# Altium PCB LMAT_AMT_MAG.PcbDoc (part 1 of 2)
Units mil, origin at the board's own origin, x right, y up, seen from the top; angles counter-clockwise.
Board outline 1437.01 x 1604.33 mil, 2 copper layers (Top Layer, Bottom Layer), stack 62.192 mil thick; 79 components, 39 nets, 215 pads, 131 vias.
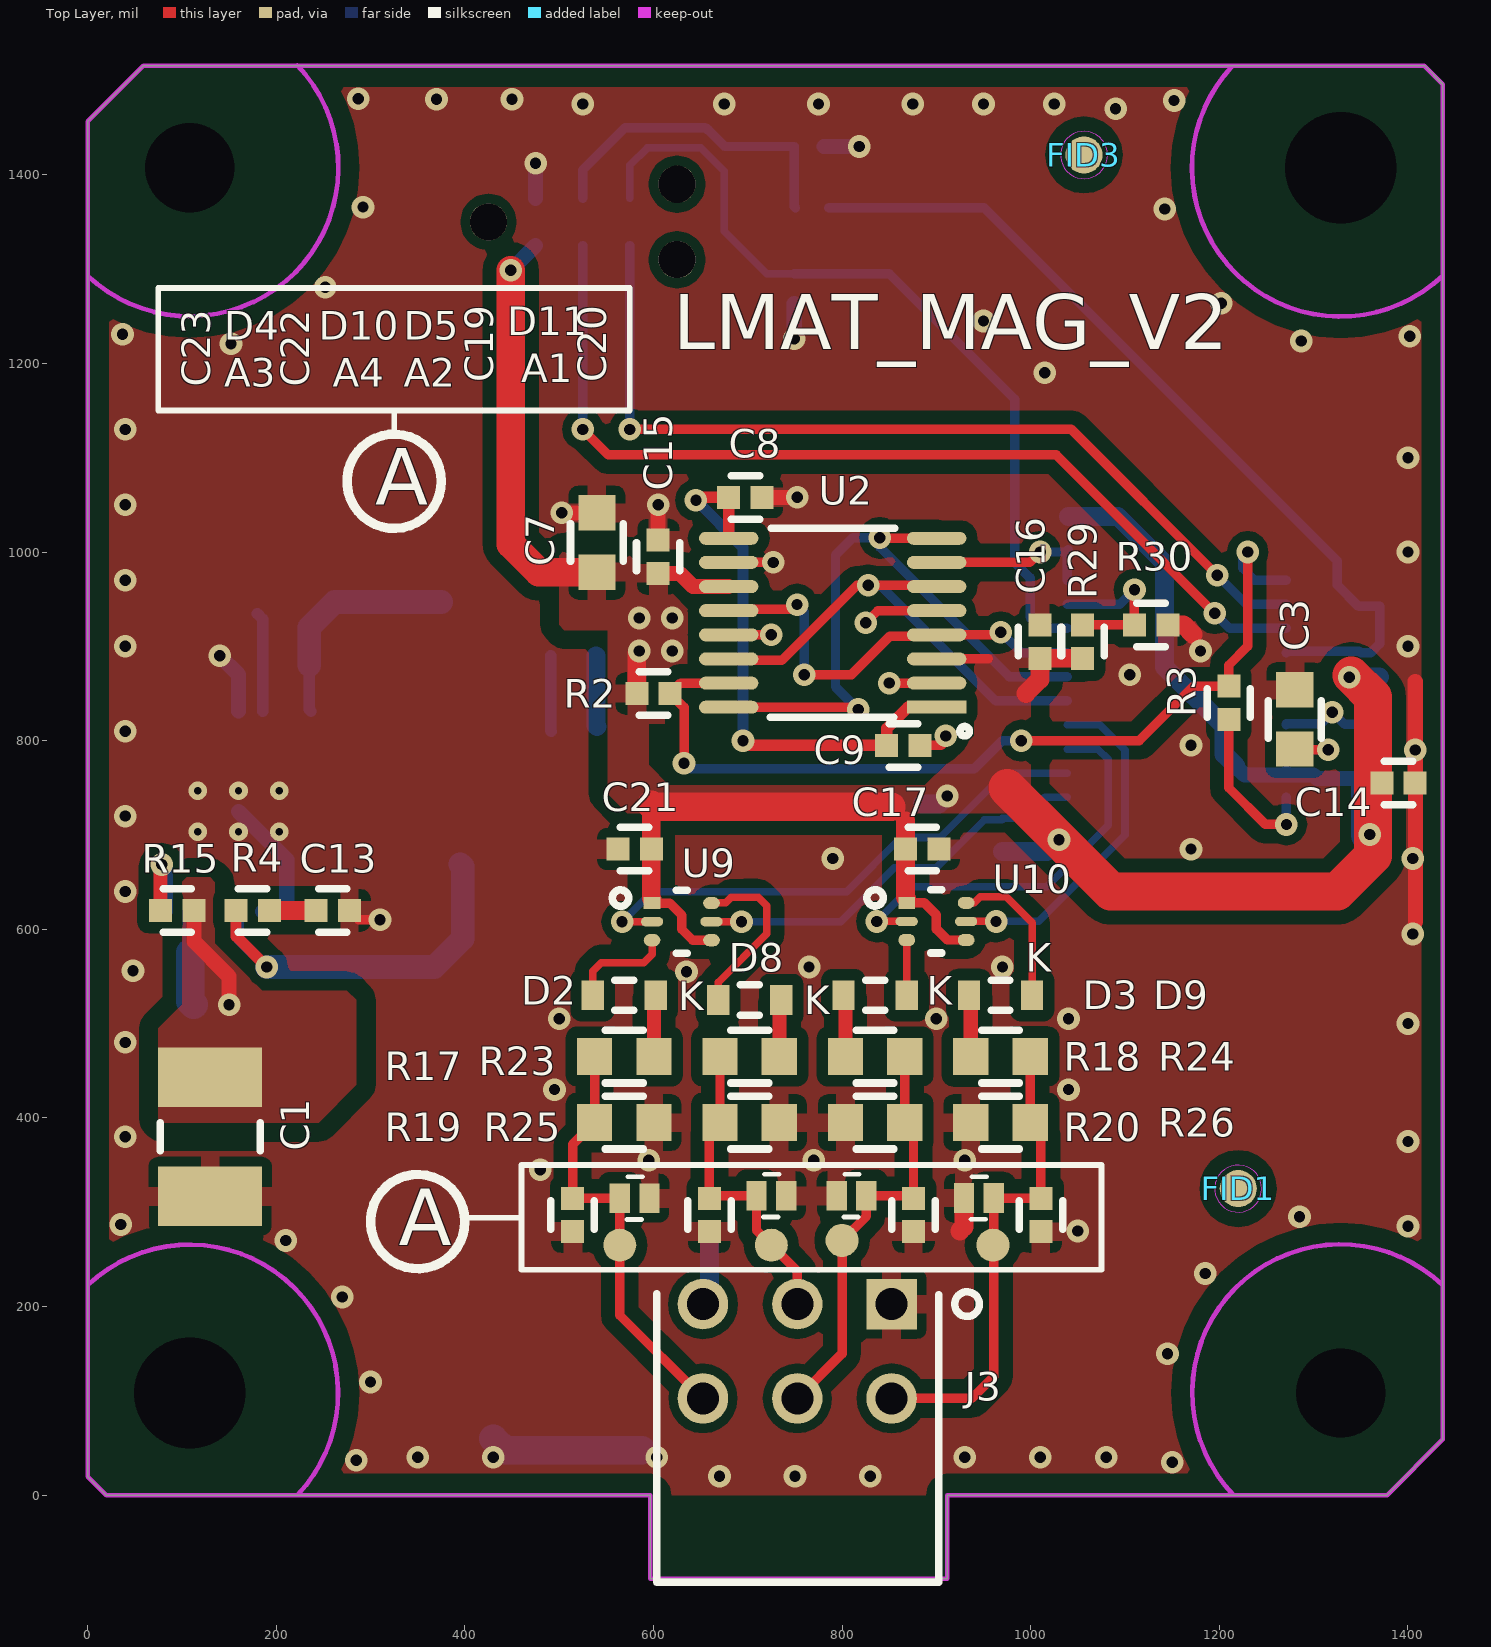
[diagram p0: Top Layer view]
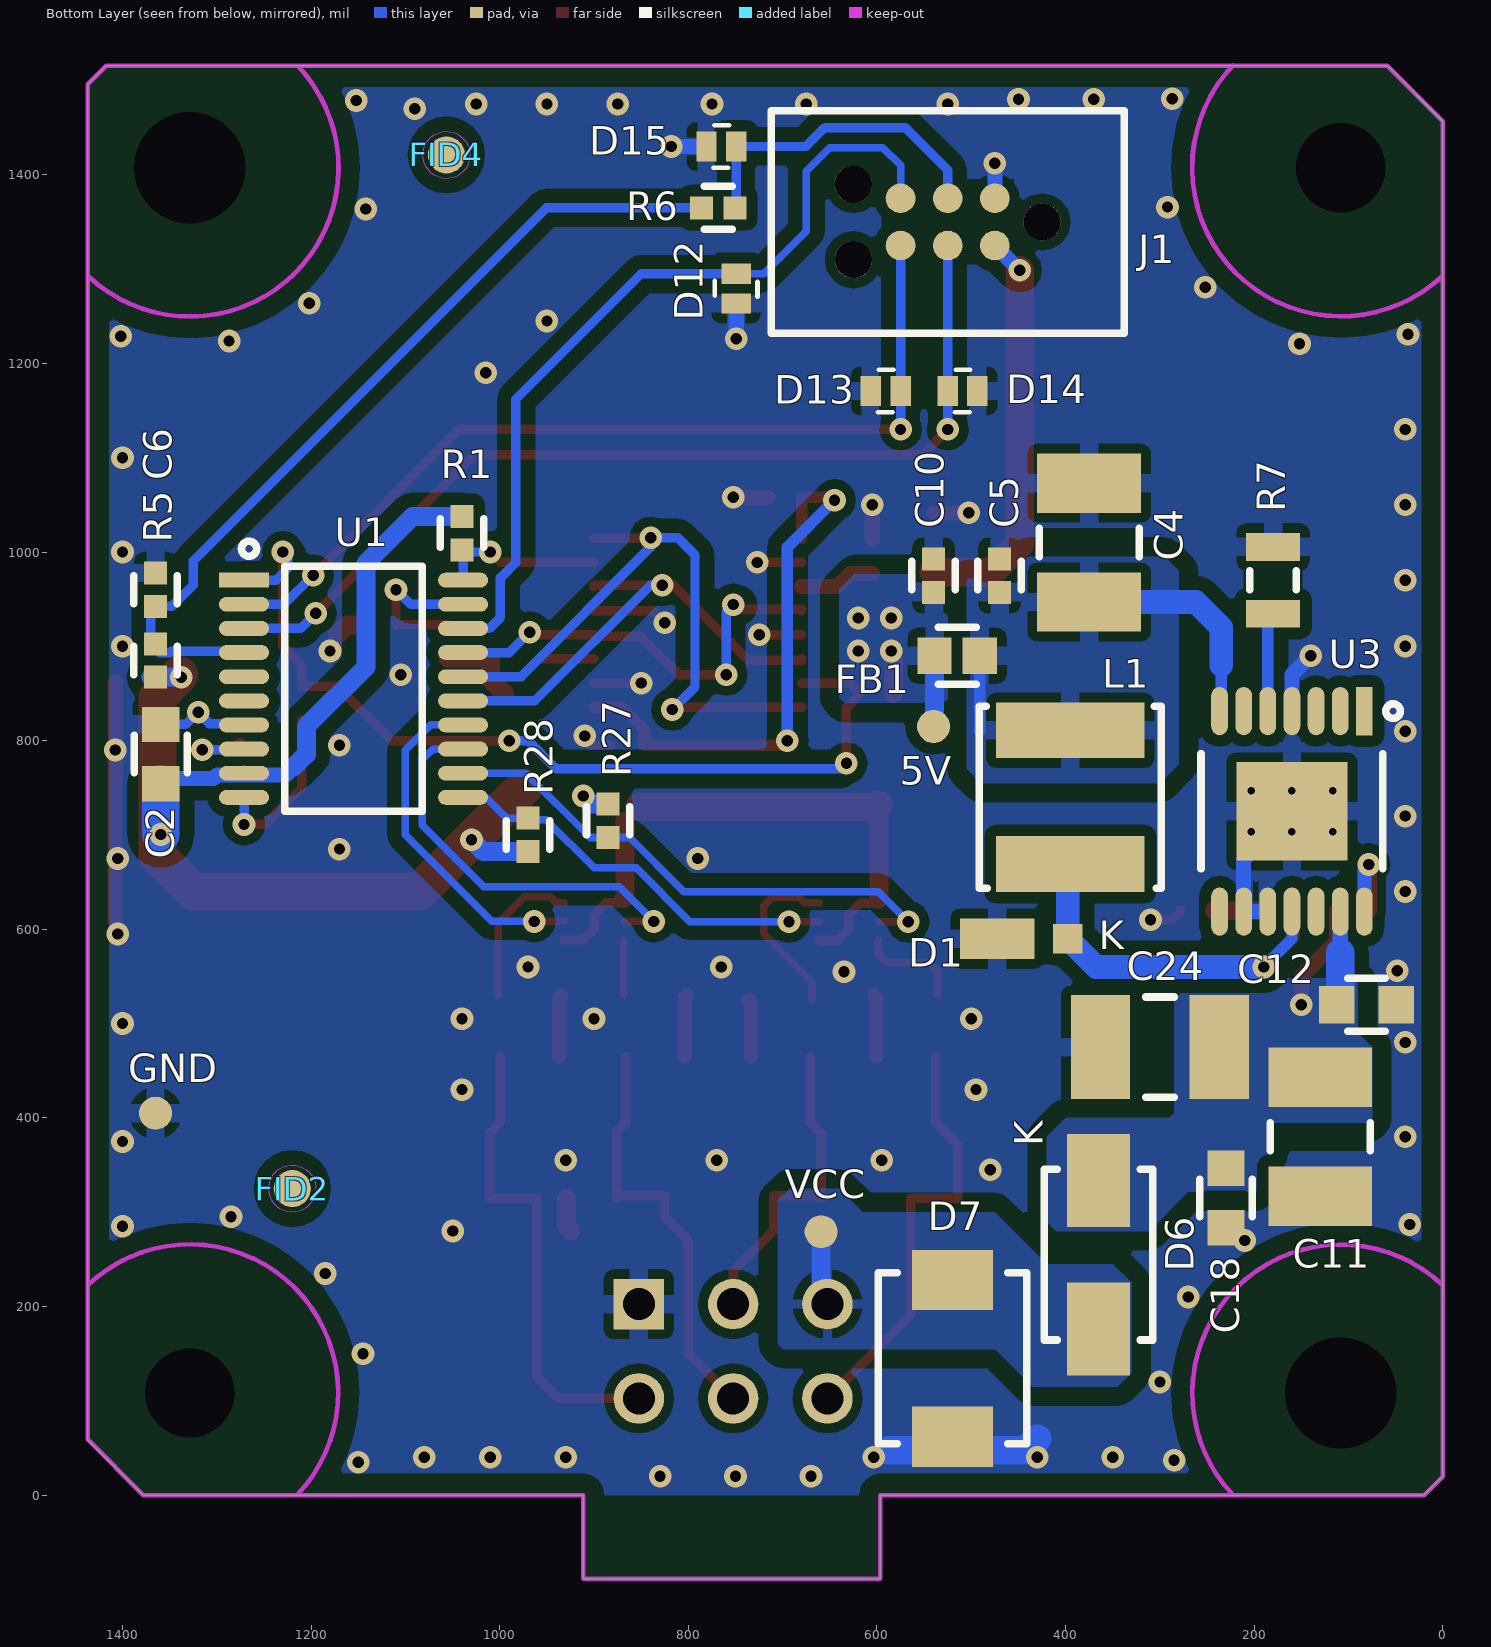
[diagram p1: Bottom Layer view, seen from below]
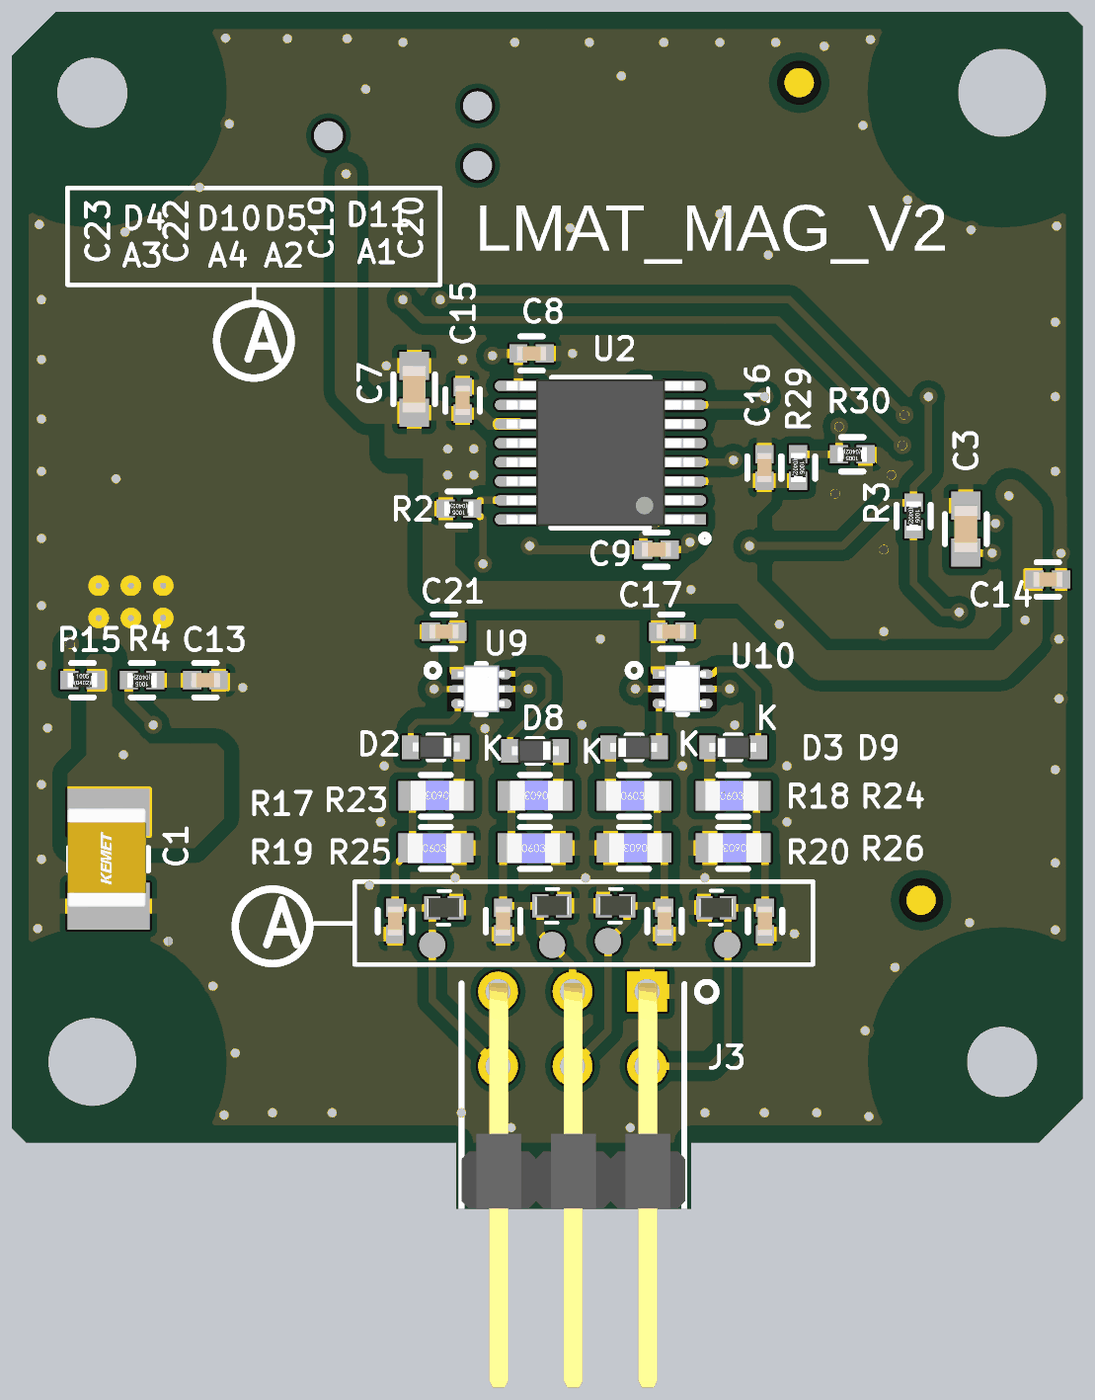
[diagram p3: 3D render of the assembled board from above, using the file's embedded part models]
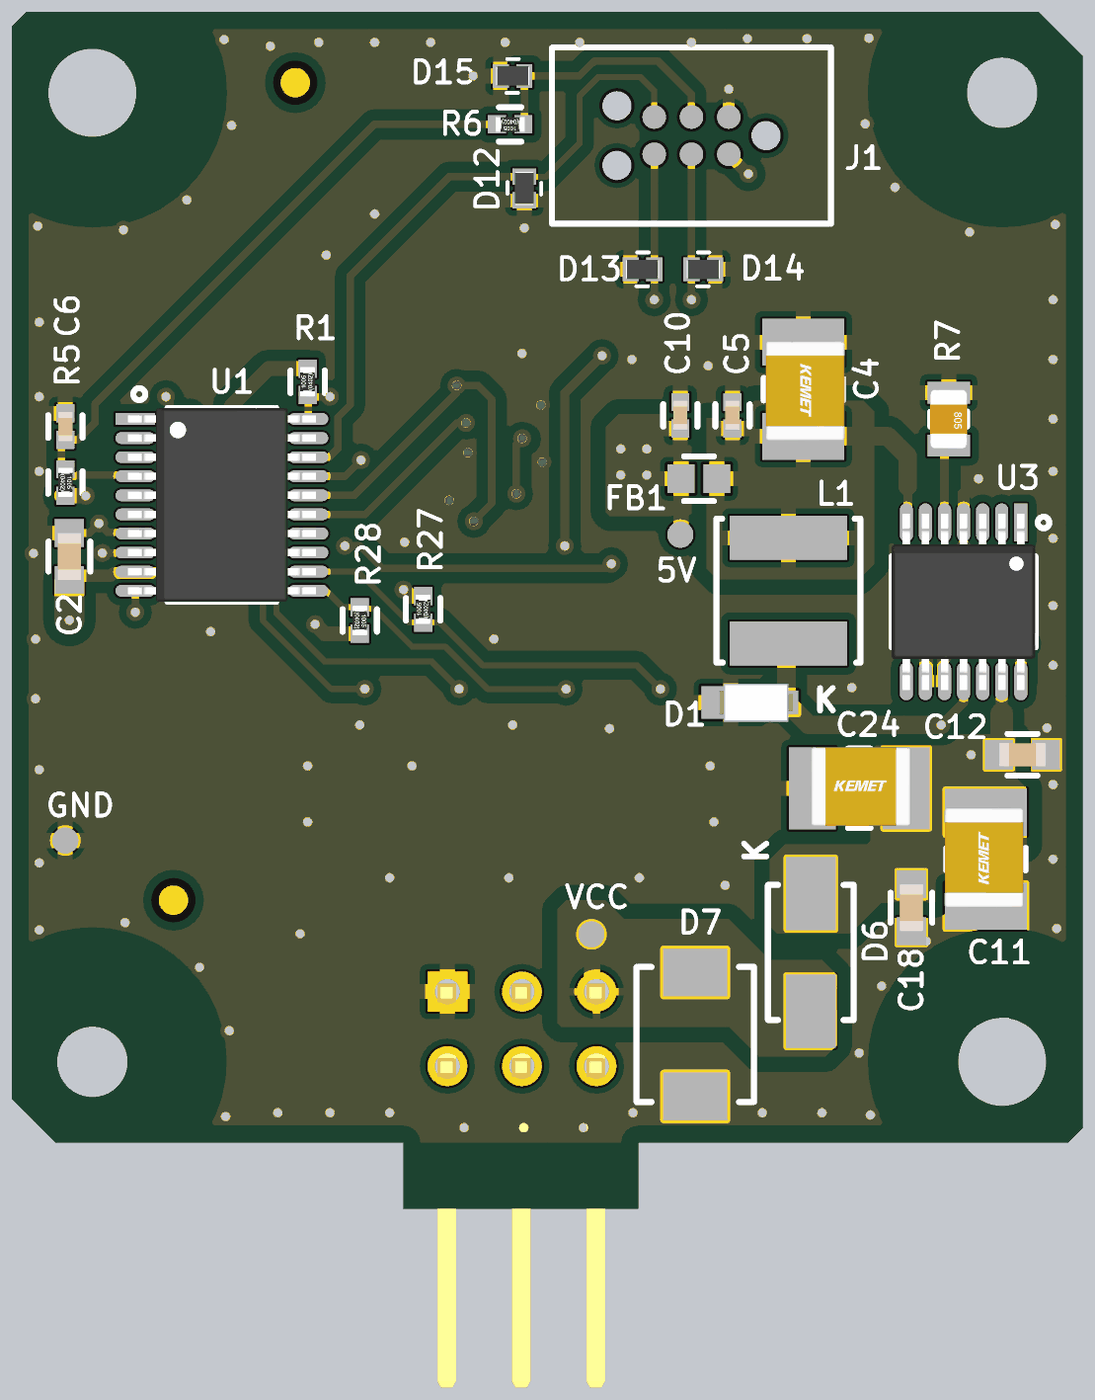
[diagram p4: 3D render of the assembled board from below, using the file's embedded part models]

## Layer stack, top to bottom
Top Solder: solder mask 0.4, Solder Resist, Dk 3.5
Top Layer: signal copper 1.4
Dielectric 1: core 59.392, FR-4, Dk 4.2
Bottom Layer: signal copper 1.4
Bottom solder: solder mask 0.4, Solder Resist, Dk 3.5

## Board outline
0,19.68 19.68,0 596.46,0 596.46,-88.58 911.42,-88.58 911.42,0 1377.95,0 1437.01,59.05 1437.01,1496.06 1417.32,1515.75 59.06,1515.75 0,1456.69

## Design rules (kind name [scope] priority, off if disabled: settings)
AcuteAngle [All] p1: minimum=6.00000000000000E+0001 checktracksonly=TRUE
Clearance Clearance_keepout [(OnLayer('Keep-Out Layer'))] p1: gap=30 ignorepadtopadclearanceinfootprint=TRUE except(0: Arc-Text Arc-Hole Track-Text Track-Hole SMDPad-Text SMDPad-Hole THPad-Text THPad-Hole Via-Text Via-Hole Fill-Text Fill-Hole Poly-Text Poly-Hole Region-Text Region-Hole Text-Text Text-Hole; 10: Arc-Track Arc-SMDPad Arc-THPad Arc-Via Track-Track Track-SMDPad Track-THPad Track-Via SMDPad-Region; 15: Arc-Arc; 20: Arc-Poly Track-Poly; 25: Fill-Fill Poly-Poly)
Clearance [All] p2: gap=15 ignorepadtopadclearanceinfootprint=TRUE except(0: Arc-Hole Track-Hole SMDPad-Hole THPad-Hole Via-Hole Fill-Hole Poly-Hole Region-Hole Text-Hole; 8: Track-SMDPad SMDPad-Via; 10: Arc-Track Track-Track Track-Via Track-Region SMDPad-SMDPad SMDPad-Region THPad-Poly THPad-Region Via-Poly Via-Region; 12: SMDPad-Poly; 20: Poly-Poly)
ComponentClearance [All] p1 off: gap=20 collisioncheckmode=3 verticalgap=20 showdistances=FALSE
FanoutControl Fanout_Default [All] p1: bgadir=Out bgaviamode=Centered fanoutstyle=Auto fanoutdirection=Alternating viagrid=1 // Fanout_Default (Default Rule)
Height Bottom [All] p1: minheight=0 maxheight=216.54 prefheight=196.85
Height TOP [All] p2: minheight=0 maxheight=62.99 prefheight=59.06
Height [All] p3: minheight=0 maxheight=393.7 prefheight=196.85
HoleSize [All] p1: absolutevalues=TRUE maxlimit=1000 minlimit=1 maxpercent=80.000 minpercent=20.000
HoleToHoleClearance [All] p1 off: gap=10 allowstackedmicrovias=TRUE
LayerPairs [All] p1 off: enforce=TRUE
MinimumAnnularRing [All] p1: minimumring=5
MinimumSolderMaskSliver [All] p1: minsoldermaskwidth=2.5
PlaneConnect [All] p1: planeconnectstyle=Direct reliefexpansion=20 reliefentries=4 reliefconductorwidth=10 reliefairgap=10
PolygonConnect PolygonConnect_Gnd [InComponent('d7','C11','C12','C18')] p1: thpad.connectstyle=Relief thpad.reliefconductorwidth=10 thpad.reliefentries=4 thpad.polygonreliefangle="90 Angle" thpad.airgapwidth=10 smdpad.connectstyle=Direct smdpad.reliefconductorwidth=10 smdpad.reliefentries=4 smdpad.polygonreliefangle="90 Angle" smdpad.airgapwidth=10 via.connectstyle=Relief via.reliefconductorwidth=10 via.reliefentries=4 via.polygonreliefangle="90 Angle" via.airgapwidth=10
PolygonConnect PolygonConnect_input [InNet('NetD6_1')] p2: thpad.connectstyle=Relief thpad.reliefconductorwidth=10 thpad.reliefentries=4 thpad.polygonreliefangle="90 Angle" thpad.airgapwidth=10 smdpad.connectstyle=Direct smdpad.reliefconductorwidth=10 smdpad.reliefentries=4 smdpad.polygonreliefangle="90 Angle" smdpad.airgapwidth=10 via.connectstyle=Direct via.reliefconductorwidth=10 via.reliefentries=4 via.polygonreliefangle="90 Angle" via.airgapwidth=10
PolygonConnect PolygonConnect_VCC [InNet('VCC_IN')] p3: thpad.connectstyle=Relief thpad.reliefconductorwidth=10 thpad.reliefentries=4 thpad.polygonreliefangle="90 Angle" thpad.airgapwidth=10 smdpad.connectstyle=Direct smdpad.reliefconductorwidth=10 smdpad.reliefentries=4 smdpad.polygonreliefangle="90 Angle" smdpad.airgapwidth=10 via.connectstyle=Direct via.reliefconductorwidth=10 via.reliefentries=4 via.polygonreliefangle="90 Angle" via.airgapwidth=10
PolygonConnect [All] p4: thpad.connectstyle=Relief thpad.reliefconductorwidth=20 thpad.reliefentries=4 thpad.polygonreliefangle="90 Angle" thpad.airgapwidth=10 smdpad.connectstyle=Relief smdpad.reliefconductorwidth=20 smdpad.reliefentries=4 smdpad.polygonreliefangle="90 Angle" smdpad.airgapwidth=10 via.connectstyle=Direct via.reliefconductorwidth=20 via.reliefentries=4 via.polygonreliefangle="90 Angle" via.airgapwidth=10
RoomDefinition LMAT_AMT_V1 [InComponentClass('LMAT_AMT_V1')] p1: confinementstyle=ConfineIn formatcopy=TRUE lockcomponents=FALSE outline -39778.63,-10384.96 -37778.63,-10384.96 -37778.63,-9384.96 -39778.63,-9384.96
RoutingVias RoutingVias_PWR [InNetClass('PWR')] p1: holewidth=12 width=24 viastyle="Through Hole" minholewidth=12 minwidth=24 maxholewidth=20 maxwidth=40
RoutingVias [All] p2: holewidth=10 width=20 viastyle="Through Hole" minholewidth=10 minwidth=20 maxholewidth=20 maxwidth=40
SilkToSilkClearance [All] p1: silktosilkclearance=3
SilkToSolderMaskClearance [IsPad] p1: minsilkscreentomaskgap=3 clearancetoexposedcopper=TRUE
SolderMaskExpansion [All] p1: expansion=4
UnpouredPolygon [All] p1: allowunpoured=TRUE allowshelved=TRUE
Width [All] p1: maxlimit=200 minlimit=8 preferedwidth=15
15 further rules are at their usual default settings.

## Classes and differential pairs
net class PWR: GND VCC_5V VCC_IN

## Components (designator, comment, footprint, x,y, rotation, side; value= is the part's Value field where it differs from the comment)
5V "Test Point- 35mil" TP_35M_DIA 540,815 r180 bottom locked
A1 "Test Point- 35mil" TP_35M_DIA 960,265 r0 top locked
A2 "Test Point- 35mil" TP_35M_DIA 800,270 r0 top locked
A3 "Test Point- 35mil" TP_35M_DIA 564.25,265 r0 top locked
A4 "Test Point- 35mil" TP_35M_DIA 725,265 r0 top locked
C1 "CAP CER 10UF 50V X7R 1210" SMDC1210 130,380 r90 top locked value=DNP
C2 "CAP CER 1UF 25V X7R 0603" SMDC0603 1359.5,785.72 r270 bottom locked value=1µF
C3 "CAP CER 1UF 25V X7R 0603" SMDC0603 1280,822.52 r90 top locked value=1µF
C4 "CAP CER 10UF 50V X7R 1210" SMDC1210 375,1010 r270 bottom locked value=10uF
C5 "CAP CER 0.1UF 16V X7R 0402" SMDC0402 470,975 r270 bottom locked value=0.1µF
C6 "CAP CER 0.1UF 16V X7R 0402" SMDC0402 1365,960 r270 bottom locked value=0.1uF
C7 "CAP CER 1UF 25V X7R 0603" SMDC0603 540,1010 r270 top locked value=1µF
C8 "CAP CER 0.047UF 25V X7R 0402" SMDC0402 697.48,1057.95 r180 top locked value=0.047µF
C9 "CAP CER 0.047UF 25V X7R 0402" SMDC0402 865,795 r180 top locked value=0.047µF
C10 "CAP CER 0.1UF 16V X7R 0402" SMDC0402 540,975 r270 bottom locked value=DNP
C11 "CAP CER 10UF 50V X7R 1210" SMDC1210 130,380 r90 bottom locked value=10uF
C12 "CAP CER 0.1UF 50V 10% X7R 0603" SMDC0603 80.98,520 r180 bottom locked value=0.1uF
C13 "CAP CER 0.1UF 16V X7R 0402" SMDC0402 260,620 r180 top locked value=0.1µF
C14 "CAP CER 0.1UF 16V X7R 0402" SMDC0402 1390,755 r180 top locked value=DNP
C15 "CAP CER 0.1UF 16V X7R 0402" SMDC0402 605,995 r270 top locked value=0.1uF
C16 "CAP CER 0.1UF 16V X7R 0402" SMDC0402 1009.84,905 r270 top locked value=0.1uF
C17 "CAP CER 0.1UF 16V X7R 0402" SMDC0402 885,685 r180 top locked value=0.1uF
C18 "CAP CER 0.1UF 50V 10% X7R 0603" SMDC0603 230,315 r270 bottom locked value=DNP
C19 "CAP CER 0.1UF 16V X7R 0402" SMDC0402 875.75,297 r90 top locked value=DNP
C20 "CAP CER 0.1UF 16V X7R 0402" SMDC0402 1010.75,297 r90 top locked value=DNP
C21 "CAP CER 0.1UF 16V X7R 0402" SMDC0402 580,685 r0 top locked value=0.1uF
C22 "CAP CER 0.1UF 16V X7R 0402" SMDC0402 659.25,297 r90 top locked value=DNP
C23 "CAP CER 0.1UF 16V X7R 0402" SMDC0402 514.25,297 r90 top locked value=DNP
C24 "CAP CER 10UF 50V X7R 1210" SMDC1210 300,475 r180 bottom locked value=10uF
D1 "DIODE SCHOTTKY 60V 1A MICROSMP" DIOM2213X07N 435,590 r180 bottom locked value=V1P6HM3/H
D2 "Diode Schottky 30V 100mA Surface Mount EMD2" SOD1700X70N-V2 569.02,529.99 r180 top locked value=RB501SM-30FHT2R
D3 "Diode Schottky 30V 100mA Surface Mount EMD2" SOD1700X70N-V2 835,529.99 r0 top locked value=RB501SM-30FHT2R
D4 "TVS DIODE 5.5V 14V 2X1SON" DFN65P100X65X45-2N 580,314.88 r180 top locked value=SZESD7410N2T5G
D5 "TVS DIODE 5.5V 14V 2X1SON" DFN65P100X65X45-2N 810,317.57 r0 top locked value=SZESD7410N2T5G
D6 "DIODE SCHOTTKY 80V 1A SMA" DO460X292X240-2N 365,255 r90 bottom locked value=B180Q-13-F
D7 "TVS DIODE 23.1V 48.3V SMB" DIOM4336X26B 520,145 r90 bottom locked value=SM6T27CAY
D8 "Diode Schottky 30V 100mA Surface Mount EMD2" SOD1700X70N-V2 702.01,525 r180 top locked value=RB501SM-30FHT2R
D9 "Diode Schottky 30V 100mA Surface Mount EMD2" SOD1700X70N-V2 967.99,529.99 r0 top locked value=RB501SM-30FHT2R
D10 "TVS DIODE 5.5V 14V 2X1SON" DFN65P100X65X45-2N 725,317.57 r180 top locked value=SZESD7410N2T5G
D11 "TVS DIODE 5.5V 14V 2X1SON" DFN65P100X65X45-2N 945,315 r0 top locked value=SZESD7410N2T5G
D12 "TVS DIODE 5.5V 14V 2X1SON" DFN65P100X65X45-2N 749.25,1279.25 r90 bottom locked value=DNP
D13 "TVS DIODE 5.5V 14V 2X1SON" DFN65P100X65X45-2N 590.75,1170.75 r180 bottom locked value=DNP
D14 "TVS DIODE 5.5V 14V 2X1SON" DFN65P100X65X45-2N 509.25,1170.75 r0 bottom locked value=DNP
D15 "TVS DIODE 5.5V 14V 2X1SON" DFN65P100X65X45-2N 765,1430 r180 bottom locked value=DNP
FB1 "FERRITE BEAD 600 OHM 0603 1LN" SMDL0603 515,890 r0 bottom locked value=BLM18KG601SH1D
FID1 "FID40X40" FID40X40 1220,325 r90 top locked
FID2 "FID40X40" FID40X40 1220,325 r90 bottom locked
FID3 "FID40X40" FID40X40 1056.5,1421 r90 top locked
FID4 "FID40X40" FID40X40 1056.5,1421 r90 bottom locked
GND "Test Point- 35mil" TP_35M_DIA 1365,405 r90 bottom locked
J1 "J-LINK 6-PIN NEEDLE ADAPTER" "PRG_8.06.16 J-LINK 6-PIN NEEDLE ADAPTER" 525,1350 r0 bottom locked value="8.06.16 J-LINK 6-PIN NEEDLE ADAPTER"
J3 "CONN HEADER R/A 6POS 2.54MM" HDRRA6W86P254_2X3_1344X254X528P_Modified 752.5,152.5 r180 top locked value=M20-9950345
L1 "FIXED IND 10UH 1.45A 144 MOHM" IND_NRS5030T3R3MMGJ 395,740 r90 bottom locked value=10uH
R1 "RES SMD 10K OHM 5% 1/10W 0402" SMDR0402 1040,1020 r90 bottom locked value=10K
R2 "RES SMD 10K OHM 5% 1/10W 0402" SMDR0402 600,850 r180 top locked value=10K
R3 "RES SMD 0 OHM JUMPER 1/10W 0402" SMDR0402 1210,840 r270 top locked value=DNP
R4 "RES SMD 510 OHM 5% 1/10W 0402" SMDR0402 175,620 r180 top locked value=510R
R5 "RES SMD 47K OHM 5% 1/10W 0402" SMDR0402 1365,885 r270 bottom locked value=47k
R6 "RES SMD 0 OHM JUMPER 1/10W 0402" SMDR0402 768.35,1365 r0 bottom locked value=0R
R7 "RES 43K OHM 5% 1/4W 0805" SMDR0805 180,970 r270 bottom locked value=43k
R15 "RES SMD 100K OHM 1% 1/10W 0402" SMDR0402 95,620 r0 top locked value=100k
R17 "RES SMD 105 OHM 1% 1/10W 0603" SMDR0603 569.02,465 r180 top locked value="105 Ohms"
R18 "RES SMD 105 OHM 1% 1/10W 0603" SMDR0603 835,465 r0 top locked value="105 Ohms"
R19 "RES SMD 210 OHM 1% 1/10W 0603" SMDR0603 569.02,395 r0 top locked value="210 Ohms"
R20 "RES SMD 210 OHM 1% 1/10W 0603" SMDR0603 835,395 r180 top locked value="210 Ohms"
R23 "RES SMD 105 OHM 1% 1/10W 0603" SMDR0603 702.01,465 r180 top locked value="105 Ohms"
R24 "RES SMD 105 OHM 1% 1/10W 0603" SMDR0603 967.99,465 r0 top locked value="105 Ohms"
R25 "RES SMD 210 OHM 1% 1/10W 0603" SMDR0603 702.01,395 r0 top locked value="210 Ohms"
R26 "RES SMD 210 OHM 1% 1/10W 0603" SMDR0603 967.99,395 r180 top locked value="210 Ohms"
R27 "RES SMD 10K OHM 5% 1/10W 0402" SMDR0402 885,715 r90 bottom locked value=10K
R28 "RES SMD 10K OHM 5% 1/10W 0402" SMDR0402 970,700 r270 bottom locked value=10K
R29 "RES SMD 4.7K OHM 1% 1/10W 0402" SMDR0402 1055,905 r270 top value=4.7K
R30 "RES SMD 4.7K OHM 1% 1/10W 0402" SMDR0402 1127.72,922.72 r180 top locked value=DNP
U1 "IC MCU 8BIT 8KB FLASH 20TSSOP" SOP65P640X120-20N 1155,855 r180 bottom locked value=STM8AF6223PCU
U2 "SENSOR HALL EFFECT SPI 16TSSOP" SOP65P640X120-16N 790,925 r90 top locked value=MLX90363KGO-ABB-000-RE
U3 "IC REG DC/DC CONVERTER" SOP65P600X170_HS-15N 160,725 r270 bottom locked value=TLF50211ELXUMA2
U9 "MOSFET 2P-CH 20V 0.55A SOT666" SOTFL50P160X60-6N 630,608.05 r0 top value=PMDT670UPE,115
U10 "MOSFET 2P-CH 20V 0.55A SOT666" SOTFL50P160X60-6N 900,608.28 r0 top locked value=PMDT670UPE,115
VCC "Test Point- 35mil" TP_35M_DIA 659.25,279.28 r90 bottom locked

## Footprints (in the part's own frame and the unit in brackets; to place one, negate y for a bottom-side part, rotate by r counter-clockwise, add the part's x,y. Pads: shape width x height; smd on the part's side, far side on the other; paste and mask are expansions set on the pad)
DFN65P100X65X45-2N [mm] "DFN, 2-Leads, Body 0.60x1.00mm, Pitch 0.65mm, IPC Medium Density"
  rect 0.55x0.8 smd mask+0.076: 1(-0.4,0) 2(0.4,0)
  silkscreen extent -0.21,-0.58 0.21,0.58, body extent -0.56,-0.32 0.56,0.33, height 0.45
DIOM2213X07N [mm] "Molded Diode, 2-Leads, Body 2.20x1.30mm, IPC Medium Density"
  rect 2x1.1 smd: 1(-0.95,0)
  rect 0.8x0.8 smd: 2(0.95,0)
  body extent -1.34,-0.65 1.16,0.65, height 0.69
DIOM4336X26B [mm] "Molded Diode, 2-Leads, Body 4.32x3.63mm, IPC Low Density"
  rect 1.62x2.18 smd: 1(-2.11,0) 2(2.11,0)
  silkscreen extent -2.3,-2 2.3,2, body extent -2.52,-1.97 2.52,1.97, height 2.65
DO460X292X240-2N [mm] "B350A-13-F, DIODE SCHOTTKY 50V 3A SMA"
  rect 2.5x1.7 smd mask+0.076: 1(-2,0) 2(2,0)
  silkscreen extent -2.3,-1.46 2.3,1.46, body extent -2.29,-1.4 2.29,1.4, height 2.4
FID40X40 [mm]
  round 1 smd paste-2 mask+0.254: 0(0,0)
  Top Layer keep-out circle w0.025: c0,0 r0.635
HDRRA6W86P254_2X3_1344X254X528P_Modified [mm] "CONN HEADER R/A 6POS 2.54MM"
  rect 1.36x1.36 hole 0.86 mask+0.076: 1(-2.54,-1.27)
  round 1.36 hole 0.86 mask+0.076: 2(0,-1.27) 3(2.54,-1.27) 4(-2.54,1.27) 5(0,1.27) 6(2.54,1.27)
  silkscreen extent -4.9,-1.6 3.78,6.22, body extent -3.84,-1.55 3.78,12.21, height 4.54
IND_NRS5030T3R3MMGJ [mm] "NRS5030T3R3MMGJ, FIXED IND 3.3UH 3A 30 MOHM SMD"
  rect 1.5x4 smd mask+0.076: 1(-1.8,0) 2(1.8,0)
  silkscreen extent -2.45,-2.45 2.45,2.45, body extent -2.45,-2.45 2.45,2.45, height 3.1
"PRG_8.06.16 J-LINK 6-PIN NEEDLE ADAPTER" [mm]
  round 1 hole 1 unplated: 0(-2.54,0) 0(2.54,1.016) 0(2.54,-1.016)
  round 0.8 smd: 1(-1.27,-0.635) 2(-1.27,0.635) 3(0,-0.635) 4(0,0.635) 5(1.27,-0.635) 6(1.27,0.635)
  Top Layer pour cut-out: -1.778,-1.143 -1.778,1.143 1.778,1.143 1.778,-1.143
  silkscreen extent -4.75,-3 4.75,3
SMDC0402 [mm]
  rect 0.62x0.62 smd mask+0.076: 1(-0.45,0) 2(0.45,0)
  Top Layer pour cut-out: -0.102,0.406 0.102,0.406 0.102,-0.406 -0.102,-0.406
  silkscreen extent -0.38,-0.58 0.38,0.58, body extent -0.5,-0.25 0.5,0.25, height 0.51
SMDC0603 [mm]
  rect 0.95x1 smd mask+0.076: 1(-0.8,0) 2(0.8,0)
  Top Layer pour cut-out: -0.203,0.559 -0.203,-0.584 0.203,-0.584 0.203,0.559
  silkscreen extent -0.51,-0.71 0.51,0.71, body extent -0.8,-0.4 0.8,0.4, height 0.81
SMDC1210 [mm] "GRM32ER71A476KE15L, CAP CER 47UF 10V X7R 1210"
  rect 1.6x2.8 smd mask+0.076: 1(-1.6,0) 2(1.6,0)
  Top Layer pour cut-out: -0.381,1.35 0.381,1.35 0.381,-1.35 -0.381,-1.35
  silkscreen extent -0.38,-1.35 0.38,1.35, body extent -1.65,-1.29 1.75,1.41, height 1.41
SMDL0603 [mm] "Chip Inductor, 2-Leads, Body 1.60x0.80mm, IPC Medium Density"
  rect 0.92x0.98 smd: 1(-0.61,0) 2(0.61,0)
  silkscreen extent -0.51,-0.76 0.51,0.76, body extent -0.87,-0.48 0.88,0.48, height 1
SMDR0402 [mm]
  rect 0.62x0.62 smd mask+0.076: 1(-0.45,0) 2(0.45,0)
  Top Layer pour cut-out: -0.102,0.381 0.076,0.381 0.076,-0.381 -0.102,-0.381
  silkscreen extent -0.38,-0.58 0.38,0.58, body extent -0.5,-0.25 0.5,0.25, height 0.35
SMDR0603 [mm]
  rect 0.95x1 smd mask+0.076: 1(-0.8,0) 2(0.8,0)
  Top Layer pour cut-out: -0.254,0.61 0.254,0.61 0.254,-0.61 -0.254,-0.61
  silkscreen extent -0.51,-0.71 0.51,0.71, body extent -0.95,-0.5 0.85,0.5, height 0.32
SMDR0805 [mm]
  rect 0.75x1.45 smd mask+0.076: 1(-0.9,0) 2(0.9,0)
  Top Layer pour cut-out: -0.381,0.787 0.406,0.787 0.406,-0.762 0.381,-0.787 -0.381,-0.787
  silkscreen extent -0.25,-0.63 0.25,0.63, body extent -1,-0.63 1,0.62, height 0.78
SOD1700X70N-V2 [mm]
  rect 0.6x0.8 smd mask+0.076: 1(-0.85,0) 2(0.85,0)
  silkscreen extent -0.25,-0.41 0.25,0.41, body extent -0.82,-0.41 0.78,0.39, height 0.7
SOP65P600X170_HS-15N [mm] "SOP, 14-Leads, Body 4.90x3.90mm, Pitch 0.65mm, Thermal Pad 3.00x2.65mm, IPC Medium Density"
  rect 1.3x0.45 smd mask+0.064: 1(-2.7,1.95)
  oval 1.3x0.45 smd mask+0.064: 2(-2.7,1.3) 3(-2.7,0.65) 4(-2.7,0) 5(-2.7,-0.65) 6(-2.7,-1.3) 7(-2.7,-1.95) 8(2.7,-1.95) 9(2.7,-1.3) 10(2.7,-0.65) 11(2.7,0) 12(2.7,0.65) 13(2.7,1.3) 14(2.7,1.95)
  rect 2.65x3 smd: 15(0,0)
  silkscreen extent -2.9,-2.45 1.55,2.92, body extent -3,-2.45 3,2.45, height 1.7
SOP65P640X120-16N [mm] "TSSOP16"
  rect 0.35x1.6 smd mask+0.076: 1(-2.275,-2.8)
  oval 0.35x1.6 smd mask+0.076: 2(-1.625,-2.8) 3(-0.975,-2.8) 4(-0.325,-2.8) 5(0.325,-2.8) 6(0.975,-2.8) 7(1.625,-2.8) 8(2.275,-2.8) 9(2.275,2.8) 10(1.625,2.8) 11(0.975,2.8) 12(0.325,2.8) 13(-0.325,2.8) 14(-0.975,2.8) 15(-1.625,2.8) 16(-2.275,2.8)
  Top Layer pour cut-out: -2.464,-3.619 2.464,-3.619 2.464,-1.993 -2.464,-1.993
  Top Layer pour cut-out: -2.464,1.981 2.464,1.981 2.464,3.607 -2.464,3.607
  silkscreen extent -3.05,-3.68 2.55,1.68, body extent -2.5,-3.2 2.5,3.2, height 1.1
SOP65P640X120-20N [mm] "TSOP, 20-Leads, Body 6.50x4.40mm, Pitch 0.65mm, IPC Medium Density"
  rect 1.35x0.4 smd mask+0.076: 1(-2.95,2.925)
  oval 1.35x0.4 smd mask+0.076: 2(-2.95,2.275) 3(-2.95,1.625) 4(-2.95,0.975) 5(-2.95,0.325) 6(-2.95,-0.325) 7(-2.95,-0.975) 8(-2.95,-1.625) 9(-2.95,-2.275) 10(-2.95,-2.925) 11(2.95,-2.925) 12(2.95,-2.275) 13(2.95,-1.625) 14(2.95,-0.975) 15(2.95,-0.325) 16(2.95,0.325) 17(2.95,0.975) 18(2.95,1.625) 19(2.95,2.275) 20(2.95,2.925)
  silkscreen extent -3.02,-3.3 1.85,3.97, body extent -3.2,-3.3 3.2,3.3, height 1.2
SOTFL50P160X60-6N [mm] "SOTFL, 6-Leads, Body 1.60x1.60mm, Pitch 0.50mm, IPC Medium Density"
  rect 0.45x0.325 smd mask+0: 1(-0.8,0.5)
  oval 0.6x0.25 smd mask+0: 2(-0.8,0) 5(0.8,0)
  oval 0.45x0.325 smd mask+0: 3(-0.8,-0.5) 4(0.8,-0.5) 6(0.8,0.5)
  silkscreen extent -1.87,-0.85 0.15,0.86, body extent -0.8,-0.8 0.8,0.8, height 0.57
TP_35M_DIA [mil]
  round 35 smd mask+3: 1(0,0)

## Part data
5V A1 A2 A3 A4 GND VCC: library part EMS-TP35MIL-S, Internal Part Number=EMS-TP35MIL-S, Part Type="Test Point- 35mil"
C1 C4 C11 C24: library part ECA10U0L50V0-SH, Manufacturer="Taiyo Yuden", Manufacturer Part Number=UMJ325KB7106KMHP, Temp Co="-55°C ~ 125°C", Vendor Part Number=587-6026-1-ND, 1st Auxiliary Field=50V, 2nd Auxiliary Field=±10%, 3rd Auxiliary Field="RoHS Compliant", 4th Auxiliary Field=AEC-Q200, Component Height (mm)=2.80mm, Internal Part Number=ECA10U0L50V0-SH, Part Type="CAP CER 10UF 50V X7R 1210", Vendor Name=Digi-Key
C2 C3 C7: library part ECA1U00L25V0-SC, Manufacturer="TDK Corporation", Manufacturer Part Number=CGA3E1X7R1E105K080AE, Temp Co="-55°C ~ 125°C", Vendor Part Number=445-173628-1-ND, 1st Auxiliary Field=25V, 2nd Auxiliary Field=±10%, 3rd Auxiliary Field="RoHS Compliant", Component Height (mm)=0.95mm, Internal Part Number=ECA1U00L25V0-SC, Part Type="CAP CER 1UF 25V X7R 0603", Vendor Name=Digi-Key
C5 C6 C10 C13 C14 C15 C16 C17 C19 C20 C21 C22 C23: library part ECA0U10L16V0-SB, Alternate Part Number=GCM155R71C104KA55D, Manufacturer="Murata Electronics North America", Manufacturer Part Number=GCM155R71C104KA55J, Temp Co="-55°C ~ 125°C", Vendor Part Number=490-7998-1-ND, 1st Auxiliary Field=16V, 2nd Auxiliary Field=±10%, 3rd Auxiliary Field="RoHS Compliant", 4th Auxiliary Field=AEC-Q200, Component Height (mm)=0.55mm, Internal Part Number=ECA0U10L16V0-SB, Part Type="CAP CER 0.1UF 16V X7R 0402", Vendor Name=Digi-Key
C8 C9: library part ECA47N0L25V0-SB, Manufacturer="Murata Electronics", Manufacturer Part Number=GCM155R71E473KA55D, Temp Co="-55°C ~ 125°C", Vendor Part Number=490-4760-1-ND, 1st Auxiliary Field=25V, 2nd Auxiliary Field=±10%, 3rd Auxiliary Field="RoHS Compliant", Component Height (mm)=0.55mm, Internal Part Number=ECA47N0L25V0-SB, Part Type="CAP CER 0.047UF 25V X7R 0402", Vendor Name=Digi-Key
C12 C18: library part ECA0U10K50V0-SC, Manufacturer="TDK Corporation", Manufacturer Part Number=CGA3E2X7R1H104K080AA, Temp Co=X7R, Vendor Part Number=445-5666-1-ND, 1st Auxiliary Field=50V, 2nd Auxiliary Field=±10%, 3rd Auxiliary Field="RoHS Compliant", Component Height (mm)=0.90mm, Internal Part Number=ECA0U10K50V0-SC, Part Type="CAP CER 0.1UF 50V X7R 0603", Vendor Name=Digi-Key
D1: library part EDDVS1A0060V0-S, Manufacturer="Vishay Semiconductor Diodes Division", Manufacturer Part Number=V1P6HM3/H, Temp Co="-40°C ~ 150°C", Vendor Part Number=V1P6HM3/HGICT-ND, 1st Auxiliary Field=60V, 2nd Auxiliary Field=1A, 3rd Auxiliary Field="RoHS Compliant", 4th Auxiliary Field=AEC-Q101, Component Height (mm)=0.73mm, Internal Part Number=EDDVS1A0060V0-S, Part Type="DIODE SCHOTTKY 60V 1A MICROSMP", Vendor Name=Digi-Key
D2 D3 D8 D9: library part EDDR0A1030V0-S, Manufacturer="Rohm Semiconductor", Manufacturer Part Number=RB501SM-30FHT2R, Temp Co="125°C (Max)", Vendor Part Number=RB501SM-30FHT2RCT-ND, 1st Auxiliary Field=30V, 2nd Auxiliary Field=100mA, 3rd Auxiliary Field="RoHS Compliant", Component Height (mm)=0.70mm, Internal Part Number=EDDR0A1030V0-S, Part Type="Diode Schottky 30V 100mA Surface Mount EMD2", Vendor Name=Digi-Key
D4 D5 D10 D11 D12 D13 D14 D15: library part EDDOS16A010V0-S, "TVS DIODE 8V 20V 2X2DFN", Manufacturer="ON Semiconductor", Manufacturer Part Number=SZESD7410N2T5G, Temp Co="-55°C ~ 150°C (TJ)", Vendor Part Number=SZESD7410N2T5GOSCT-ND, 1st Auxiliary Field=10V, 2nd Auxiliary Field=16A, 3rd Auxiliary Field="RoHS Compliant", 4th Auxiliary Field=AEC-Q101, Component Height (mm)=0.40mm, Internal Part Number=EDDOS16A010V0-S, Part Type="TVS DIODE 8V 20V 2X2DFN", Vendor Name=Digi-Key
D6: library part EDDDI1A0080V0-S, Manufacturer="Diodes Incorporated", Manufacturer Part Number=B180Q-13-F, Temp Co="-65°C ~ 155°C", Vendor Part Number=B180Q-13-FDICT-ND, 1st Auxiliary Field=80V, 2nd Auxiliary Field=1A, 3rd Auxiliary Field="RoHS Compliant", 4th Auxiliary Field=AEC-Q101, Component Height (mm)=2.40mm, Internal Part Number=EDDDI1A0080V0-S, Part Type="DIODE SCHOTTKY 80V 1A SMA", Vendor Name=Digi-Key
D7: library part EDDST83A025V7-S, Manufacturer=STMicroelectronics, Manufacturer Part Number=SM6T27CAY, Temp Co="-55°C ~ 150°C (TJ)", Vendor Part Number=497-10798-1-ND, 1st Auxiliary Field=25.7V, 2nd Auxiliary Field=600W, 3rd Auxiliary Field="RoHS Compliant", Component Height (mm)=2.65mm, Internal Part Number=EDDST83A025V7-S, Part Type="TVS DIODE 23.1V 48.3V SMB", Vendor Name=Digi-Key
FB1: library part EIN600R1A30-S, Manufacturer="Murata Electronics North America", Manufacturer Part Number=BLM18KG601SH1D, Temp Co="-55°C ~ 125°C", Vendor Part Number=490-13259-1-ND, 1st Auxiliary Field="150 mOhm", 2nd Auxiliary Field=1.3A, 3rd Auxiliary Field="RoHS Compliant", 4th Auxiliary Field=AEC-Q200, Component Height (mm)=0.95mm, Internal Part Number=EIN600R1A30-S, Part Type="FERRITE BEAD 600 OHM 0603 1LN", Vendor Name=Digi-Key
FID1 FID2 FID3 FID4: library part FID_40X40
J1: library part "EMS-8.06.16 J-LINK 6-PIN NEEDLE ADAPTER", Manufacturer="Segger Microcontroller Systems", Manufacturer Part Number="8.06.16 J-LINK 6-PIN NEEDLE ADAPTER", Vendor Part Number=899-1051-ND, 1st Auxiliary Field=J-Link, 3rd Auxiliary Field="RoHS Compliant", Internal Part Number="EMS-8.06.16 J-LINK 6-PIN NEEDLE ADAPTER", Part Type="J-LINK 6-PIN NEEDLE ADAPTER", Vendor Name=Digi-Key
J3: library part ECN-M20-9950345-0003-0060, Manufacturer="Harwin Inc.", Manufacturer Part Number=M20-9950345, Temp Co="-40°C ~ 105°C", Vendor Part Number=952-2092-ND, 1st Auxiliary Field=6pos, 2nd Auxiliary Field="2 rows", 3rd Auxiliary Field="RoHS Compliant", Component Height (mm)=5.08mm, Internal Part Number=ECN-M20-9950345-0003-0060, Part Type="CONN HEADER R/A 6POS 2.54MM", Vendor Name=Digi-Key
L1: library part EIN10U0N1A45-S, Manufacturer="Taiyo Yuden", Manufacturer Part Number=NRS5020T100MMGJV, Temp Co="-40°C ~ 125°C", Vendor Part Number=587-3594-1-ND, 1st Auxiliary Field=1.45A, 2nd Auxiliary Field=±20%, 3rd Auxiliary Field="RoHS Compliant", 4th Auxiliary Field=AEC-Q200, Component Height (mm)=2.00mm, Internal Part Number=EIN10U0N1A45-S, Part Type="FIXED IND 10UH 1.45A 144 MOHM", Vendor Name=Digi-Key
R1 R2 R27 R28: library part ERE10K0K110-SB, Manufacturer="Panasonic Electronic Components", Manufacturer Part Number=ERJ-2GEJ103X, Temp Co=±200ppm/°C, Vendor Part Number=P10KJCT-ND, 1st Auxiliary Field=0.1W, 2nd Auxiliary Field=±5%, 3rd Auxiliary Field="RoHS Compliant", Component Height (mm)=0.40mm, Internal Part Number=ERE10K0K110-SB, Part Type="RES SMD 10K OHM 5% 1/10W 0402", Vendor Name=Digi-Key
R3 R6: library part ERE0R00R110-SB, Manufacturer="Panasonic Electronic Components", Manufacturer Part Number=ERJ-2GE0R00X, Temp Co="-55°C ~ 155°C", Vendor Part Number=P0.0JCT-ND, 1st Auxiliary Field=0.1W, 2nd Auxiliary Field=Jumper, 3rd Auxiliary Field="RoHS Compliant", 4th Auxiliary Field=AEC-Q200, Component Height (mm)=0.40mm, Internal Part Number=ERE0R00R110-SB, Part Type="RES SMD 0 OHM JUMPER 1/10W 0402", Vendor Name=Digi-Key
R4: library part ERE510RK110-SB, Alternate Part Number=RK73B1ETTP511J, Manufacturer="Panasonic Electronic Components", Manufacturer Part Number=ERJ-2GEJ511X, Temp Co="-55°C ~ 155°C", Vendor Part Number=P510JCT-ND, 1st Auxiliary Field=0.1W, 2nd Auxiliary Field=±5%, 3rd Auxiliary Field="RoHS Compliant", Component Height (mm)=0.40mm, Internal Part Number=ERE510RK110-SB, Part Type="RES SMD 510 OHM 5% 1/10W 0402", Vendor Name=Digi-Key
R5: library part ERE47K0K110-SB, Manufacturer="Panasonic Electronic Components", Manufacturer Part Number=ERJ-2GEJ473X, Temp Co=±200ppm/°C, Vendor Part Number=P47KJCT-ND, 1st Auxiliary Field=0.1W, 2nd Auxiliary Field=±5%, 3rd Auxiliary Field="RoHS Compliant", Component Height (mm)=0.40mm, Internal Part Number=ERE47K0K110-SB, Part Type="RES SMD 47K OHM 5% 1/10W 0402", Vendor Name=Digi-Key
R7: library part ERE43K0K140-SE, Manufacturer="KOA Speer Electronics, Inc.", Manufacturer Part Number=RK73B2ATTD433J, Temp Co="-55°C ~ 155°C", Vendor Part Number=2019-RK73B2ATTD433JCT-ND, 1st Auxiliary Field=0.25W, 2nd Auxiliary Field=±5%, 3rd Auxiliary Field="RoHS Compliant", 4th Auxiliary Field=AEC-Q200, Component Height (mm)=0.60mm, Internal Part Number=ERE43K0K140-SE, Part Type="RES 43K OHM 5% 1/4W 0805", Vendor Name=Digi-Key
R15: library part ERE100KG110-SB, Alternate Part Number=ERJ-2GEJ104X, Manufacturer="Panasonic Electronic Components", Manufacturer Part Number=ERJ-2RKF1003X, Temp Co=±100ppm/°C, Vendor Part Number=P100KLCT-ND, 1st Auxiliary Field=0.1W, 2nd Auxiliary Field=±1%, 3rd Auxiliary Field="RoHS Compliant", 4th Auxiliary Field=AEC-Q200, Component Height (mm)=0.40mm, Internal Part Number=ERE100KG110-SB, Part Type="RES SMD 100K OHM 1% 1/10W 0402", Vendor Name=Digi-Key
R17 R18 R23 R24: library part ERE105RG110-SC, Manufacturer="Panasonic Electronic Components", Manufacturer Part Number=ERJ-3EKF1050V, Temp Co="-55°C ~ 155°C", Vendor Part Number=P105HCT-ND, 1st Auxiliary Field=0.1W, 2nd Auxiliary Field=±1%, 3rd Auxiliary Field="RoHS Compliant", 4th Auxiliary Field=AEC-Q200, Component Height (mm)=0.55mm, Internal Part Number=ERE105RG110-SC, Part Type="RES SMD 105 OHM 1% 1/10W 0603", Vendor Name=Digi-Key
R19 R20 R25 R26: library part ERE210RG110-SC, Manufacturer="Panasonic Electronic Components", Manufacturer Part Number=ERJ-3EKF2100V, Temp Co="-55°C ~ 155°C", Vendor Part Number=P210HCT-ND, 1st Auxiliary Field=0.1W, 2nd Auxiliary Field=±1%, 3rd Auxiliary Field="RoHS Compliant", 4th Auxiliary Field=AEC-Q200, Component Height (mm)=0.55mm, Internal Part Number=ERE210RG110-SC, Part Type="RES SMD 210 OHM 1% 1/10W 0603", Vendor Name=Digi-Key
R29 R30: library part ERE4K70G110-SB, Alternate Part Number=RK73H1ETTP4701F, Manufacturer="Panasonic Electronic Components", Manufacturer Part Number=ERJ-2RKF4701X, Temp Co=±100ppm/°C, Vendor Part Number=P4.70KLCT-ND, 1st Auxiliary Field=0.1W, 2nd Auxiliary Field=±1%, 3rd Auxiliary Field="RoHS Compliant", 4th Auxiliary Field=AEC-Q200, Component Height (mm)=0.40mm, Internal Part Number=ERE4K70G110-SB, Part Type="RES SMD 4.7K OHM 1% 1/10W 0402", Vendor Name=Digi-Key
U1: library part EICSTMTSSOP-20-1691, Manufacturer=STMicroelectronics, Manufacturer Part Number=STM8AF6223PCU, Temp Co="-40°C ~ 125°C (TA)", Vendor Part Number=497-17896-ND, 1st Auxiliary Field="3V ~ 5.5V", 2nd Auxiliary Field=8-Bit, 3rd Auxiliary Field="RoHS Compliant", Component Height (mm)=1.2mm, Internal Part Number=EICSTMTSSOP-20-1691, Part Type="IC MCU 8BIT 8KB FLASH 20TSSOP", Vendor Name=Digi-Key
U2: library part EICMTTSSOP-16-1690, Manufacturer="Melexis Technologies NV", Manufacturer Part Number=MLX90363KGO-ABB-000-RE, Temp Co="-40°C ~ 125°C (TA)", Vendor Part Number=MLX90363KGO-ABB-000-RECT-ND, 1st Auxiliary Field="4.5V ~ 5.5V", 2nd Auxiliary Field=15.5mA, 3rd Auxiliary Field="RoHS Compliant", Component Height (mm)=1.1mm, Internal Part Number=EICMTTSSOP-16-1690, Part Type="SENSOR HALL EFFECT SPI 16TSSOP", Vendor Name=Digi-Key
U3: library part EICITLSSOP-14-1747, Manufacturer="Infineon Technologies", Manufacturer Part Number=TLF50211ELXUMA2, Temp Co="-40°C ~ 150°C (TJ)", Vendor Part Number=TLF50211ELXUMA2CT-ND, 1st Auxiliary Field=45V, 2nd Auxiliary Field=500mA, 3rd Auxiliary Field="RoHS Compliant", 4th Auxiliary Field=AEC-Q100, Component Height (mm)=1.7mm, Internal Part Number=EICITLSSOP-14-1747, Part Type="IC REG DC/DC CONVERTER", Vendor Name=Digi-Key
U9 U10: library part EICNUSOT666-06-0004, Manufacturer="Nexperia USA Inc.", Manufacturer Part Number=PMDT670UPE,115, Temp Co="-55°C ~ 150°C (TJ)", Vendor Part Number=1727-1334-1-ND, 1st Auxiliary Field=20V, 2nd Auxiliary Field=550mA, 3rd Auxiliary Field="RoHS Compliant", 4th Auxiliary Field=AEC-Q101, Component Height (mm)=0.6mm, Internal Part Number=EICNUSOT666-06-0004, Part Type="MOSFET 2P-CH 20V 0.55A SOT666", Vendor Name=Digi-Key

## Free pads (board coordinates)
  round 4 hole 118.11 unplated: MH(108.27,108.27) MH(1328.74,1407.48)
  round 4 hole 94.49 unplated: MH(108.27,1407.48) MH(1328.74,108.27)

## Via types
v1: diameter 24, hole 12, Top Layer to Bottom Layer, tented both sides, 125 vias
v2: diameter 19.68, hole 7.87, Top Layer to Bottom Layer, 6 vias

## Nets (pads, with @x,y where several pads share a name; then routed paths per layer and width w, separated by ;. In a path a pad name is that pad's centre, name@x,y a point inside that pad or via, vN(x,y) a via of type N, cw(c..) or ccw(c..) an arc to the next point about the centre after c; other vN are vias at no path point)
CS1: R2.1 R3.1 U1.1 U2.15 | length 980.8
  Top Layer w10: v1(632.43,776) 632.43,835.29 R2.1@617.72,850 628.74,861.02 U2.15@679.76,861.02 ; v1(990,800) 1115,800 1172.72,857.72 R3.1@1210,857.72 1210,880 1230,900 v1@1230,995.77
  Bottom Layer w10: v1(632.43,776) 638.43,770 940,770 970,800 v1(990,800) ; v1(1230,1000) 1229.49,1000 1224.74,995.26 1224.74,982.71 1237.3,970.16 U1.1@1271.14,970.16
CS2: R1.1 U1.20 U2.7 | length 176.3
  Top Layer w10: U2.7@900.24,988.98 998.98,988.98 v1(1010,1000)
  Bottom Layer w10: v1(1010,1000) 1037.72,1000 R1.1@1038.86,1001.14 ; U1.20@1038.86,970.16 R1.1@1038.86,1001.14 ; R1.1@1040,1002.28 R1.1@1038.86,1001.14
DEBUG: R29.1 R30.2 U1.19 | length 169.8
  Top Layer w10: R29.1@1055,922.72 R30.2@1110,922.72 v1(1110,960)
  Bottom Layer w10: U1.19@1038.86,944.57 1094.57,944.57 v1(1110,960)
GND: C1.1 C2.1 C3.2 C4.1 C5.1 C6.1 C7.1 C8.1 C9.1 C10.1 C11.1 C12.2 C13.1 C14.1 C15.1 C16.1 C17.1 C18.2 C19.1 C20.1 C21.1 C22.1 C23.1 C24.1 D1.1 D4.1 D5.1 D7.1 D10.1 D11.1 D12.1 D13.1 D14.1 D15.1 GND.1 J1.1 J3.1 R7.1 R19.2 R20.2 R25.2 R26.2 R30.1 U1.7 U2.2 U2.5 U2.10 U2.13 U3.4 U3.9 U3.10 U3.15 | length 1343.5
  Top Layer w10: C13.1@277.72,620 287.72,610 v1(310,610) ; U2.13@679.76,912.2 v1(725,912.2) v1@730,912.2 ; U2.10@679.76,988.98 v1(727,988.98) v1@730,988.98 ; v1(825,925) 837.8,937.8 U2.5@900.24,937.8 ; v1(850,861.02) U2.2@900.24,861.02 ; C9.1@882.72,795 905,795 915,805 v1(910,805)
  Top Layer w16: v1(502.72,1041.5) C7.1@540,1041.5 ; C15.1@605,1012.72 v1(605,1050) ; C8.1@715.2,1057.95 v1(752.48,1057.95) ; 1407.72,862.87 v1(1407.72,790) C14.1@1407.72,755 1408,754.72 1408,608
  Top Layer w20: 924.9,280.1 929.25,284.46 D11.1@929.25,315 ; R30.1@1145.43,922.72 1162.03,922.72 1172.37,912.37
  Bottom Layer w10: U1.7@1271.14,816.61 1271.14,818.02 1307.82,818.02 v1(1319.82,830.02) 1320.21,830.02 1333.02,817.21 C2.1@1359.5,817.21 C2.1@1364.5,817.21
  Bottom Layer w16: v1(140,890) 160,870 U3.4@160,831.3 ; U3.15@160,725 170.83,714.17 211.18,673.82 U3.9@211.18,618.7 U3.10@185.59,618.7 ; J1.1@475,1375 v1(475,1412.28) ; v1(749.25,1226.22) D12.1@749.25,1263.5 ; D15.1@780.75,1430 v1(818.03,1430)
  Bottom Layer w30: 430,60 442.5,47.5 587.5,47.5
  other v1: 670,20 750,20 830,20 1150,35 285,37.01 350,40 430,40 603.5,40 930,40 1010,40 1080,40 300,120 1145,150 270,210 1185,235 210,270 1050,280 1400,285 35,287.01 1285,295 480,345 595,355 770,355 930,355 1400,375 40,380 495,430 1040,430 40,480 1400,500 500,505 900,505 1040,505 635,555 48.19,555.98 765,560 970,560 1405,595 40,640 790,675 1405,675 1170,685 40,720 1170,795 40,810 1105,870 1180,895 40,900 1400,900 40,970 1400,1000 40,1050 1400,1100 40,1130 1015,1190 152.01,1220.75 1287.01,1223.74 1402.01,1228.74 37.01,1230.75 950,1245 1202.01,1263.74 252.01,1280.75 1142.01,1363.74 292.01,1365.75 1090,1470 525,1475 675,1475 775,1475 875,1475 950,1475 1025,1475 1152.01,1478.74 370,1480 450,1480 287.01,1480.75
  other v2: 116.69,703.35 160,703.35 203.31,703.35 116.69,746.65 160,746.65 203.31,746.65
MISO: U1.17 U2.4 U2.12 | length 464.9
  Top Layer w10: U2.12@679.76,937.8 679.76,939.2 747.2,939.2 v1(752.27,944.27) ; v1(760,870) 810,870 850.8,910.8 900.24,910.8 U2.4@900.24,912.2 965.54,912.2 v1(968.33,915)
  Bottom Layer w10: v1@747.27,944.27 747.27,942.27 v1@748.77,940.77 ; v1(752.27,944.27) 760,936.53 v1(760,870) ; v1(968.33,915) 989.95,893.39 U1.17@1038.86,893.39
MOSI: U1.16 U2.8 U2.16 | length 692.6
  Top Layer w10: U2.16@679.76,835.43 814.57,835.43 v1(817,833) ; v1(840,1015) 840.43,1014.57 U2.8@900.24,1014.57
  Bottom Layer w10: v1(817,833) 793,857 793,996.84 811.16,1015 v1(840,1015) 840,1005.15 977.36,867.8 U1.16@1038.86,867.8
NetC3_1: C3.1 U1.8 | length 89
  Top Layer w10: C3.1@1275,798.5 1283.5,790 1283.94,790.44 v1(1315.44,790.44)
  Bottom Layer w10: U1.8@1271.14,791.02 1272.17,790 1272.6,790.44 v1(1315.44,790.44)
NetC4_2: C4.2 C5.2 FB1.1 L1.2 U3.7 | length 320.8
  Bottom Layer w12: 235,880 235,833.07 U3.7@236.77,831.3 ; FB1.1@490.98,890 490.98,810.47 491.46,810
  Bottom Layer w25: 235,880 235,920 262.01,947.01 C4.2@375,947.01
NetC8_2: C8.2 C9.2 U2.1 U2.9 | length 596.8
  Top Layer w12: v1(645,1055) 647.95,1057.95 C8.2@679.76,1057.95 U2.9@679.76,1014.57 ; v1(695,800) 700,795 C9.2@847.28,795 ; C9.2@842.28,800 C9.2@847.28,795 ; U2.1@900.24,835.43 869.72,835.43 847.28,813 C9.2@847.28,795
  Bottom Layer w12: v1(645,1055) 695,1005 v1(695,800)
NetC13_2: C13.2 R4.1 | length 49.6
  Top Layer w20: R4.1@192.72,620 C13.2@242.28,620
NetD1_2: D1.2 L1.1 R4.2 U3.11 | length 444.9
  Top Layer w12: R4.2@157.28,620 157.28,592.72 v1(190,560)
  Bottom Layer w12: U3.11@160,618.7 160,590 v1(190,560)
  Bottom Layer w25: v1(190,560) 367.6,560 D1.2@397.6,590 397.6,666.54 L1.1@395,669.13
NetD2_1: D2.1 R17.1 | length 65.8
  Top Layer w15: R17.1@600.51,465 600.51,528.02 D2.1@602.48,529.99
NetD2_2: D2.2 U9.3 | length 110.8
  Top Layer w8: D2.2@535.55,529.99 535.55,555.55 544.5,564.5 589.5,564.5 598.5,573.5 U9.3@598.5,588.37
NetD3_1: D3.1 R18.1 | length 65.8
  Top Layer w15: D3.1@801.54,529.99 803.5,528.02 R18.1@803.5,465
NetD3_2: D3.2 U10.3 | length 58.6
  Top Layer w8: D3.2@868.46,529.99 868.46,588.55 U10.3@868.5,588.59
NetD6_1: D6.1 D7.2 J3.3 VCC.1 | length 79.6
  Bottom Layer w20: J3.3@652.5,202.5 659.25,209.25 VCC.1@659.25,279.28
NetD8_1: D8.1 R23.1 | length 60.8
  Top Layer w15: R23.1@733.5,465 733.5,523.03 D8.1@735.47,525
NetD8_2: D8.2 U9.6 | length 186.2
  Top Layer w8: U9.6@661.5,627.74 662.03,628.27 676.73,628.27 682.51,634.05 695,634.05 710.95,634.05 720,625 720,595 668.54,543.54 D8.2@668.54,525
NetD9_1: D9.1 R24.1 | length 65.8
  Top Layer w15: D9.1@934.53,529.99 936.5,528.02 R24.1@936.5,465
NetD9_2: D9.2 U10.6 | length 160.8
  Top Layer w8: U10.6@931.5,627.96 939.96,627.96 946.28,634.28 974.05,634.28 1001.46,606.87 D9.2@1001.46,529.99
NetD15_2: D15.2 J1.3 R6.1 | length 346.7
  Bottom Layer w10: J1.3@525,1375 525,1405 570,1450 655,1450 657.31,1447.69 657.87,1447.69 675.56,1430 D15.2@749.25,1430 749.25,1366.38 R6.1@750.63,1365
NetR3_2: R3.2 U1.10 | length 178.2
  Top Layer w10: R3.2@1210,822.28 1210,750 1248.86,711.14 v1(1271.14,711.14)
  Bottom Layer w10: v1(1271.14,711.14) U1.10@1271.14,739.84
NetR7_2: R7.2 U3.5 | length 105.6
  Bottom Layer w12: R7.2@180,934.57 185.59,928.98 U3.5@185.59,831.3
NetR15_1: R15.1 U3.14 | length 101
  Top Layer w15: R15.1@77.28,620 77.28,667.28 v1(78.64,668.64)
  Bottom Layer w15: v1(78.64,668.64) 83.23,664.06 U3.14@83.23,618.7
nRESET: C6.2 R5.1 R6.2 U1.4 | length 917.6
  Bottom Layer w10: R6.2@786.06,1365 950.46,1365 1325,990.46 1325,965 1347.72,942.28 C6.2@1365,942.28 1370,942.28 1370,902.72 1360.67,893.39 1349.8,893.39 1348.18,895 1272.76,895 U1.4@1271.14,893.39